# EAGLE board pca_full (EAGLE 6.5.0)
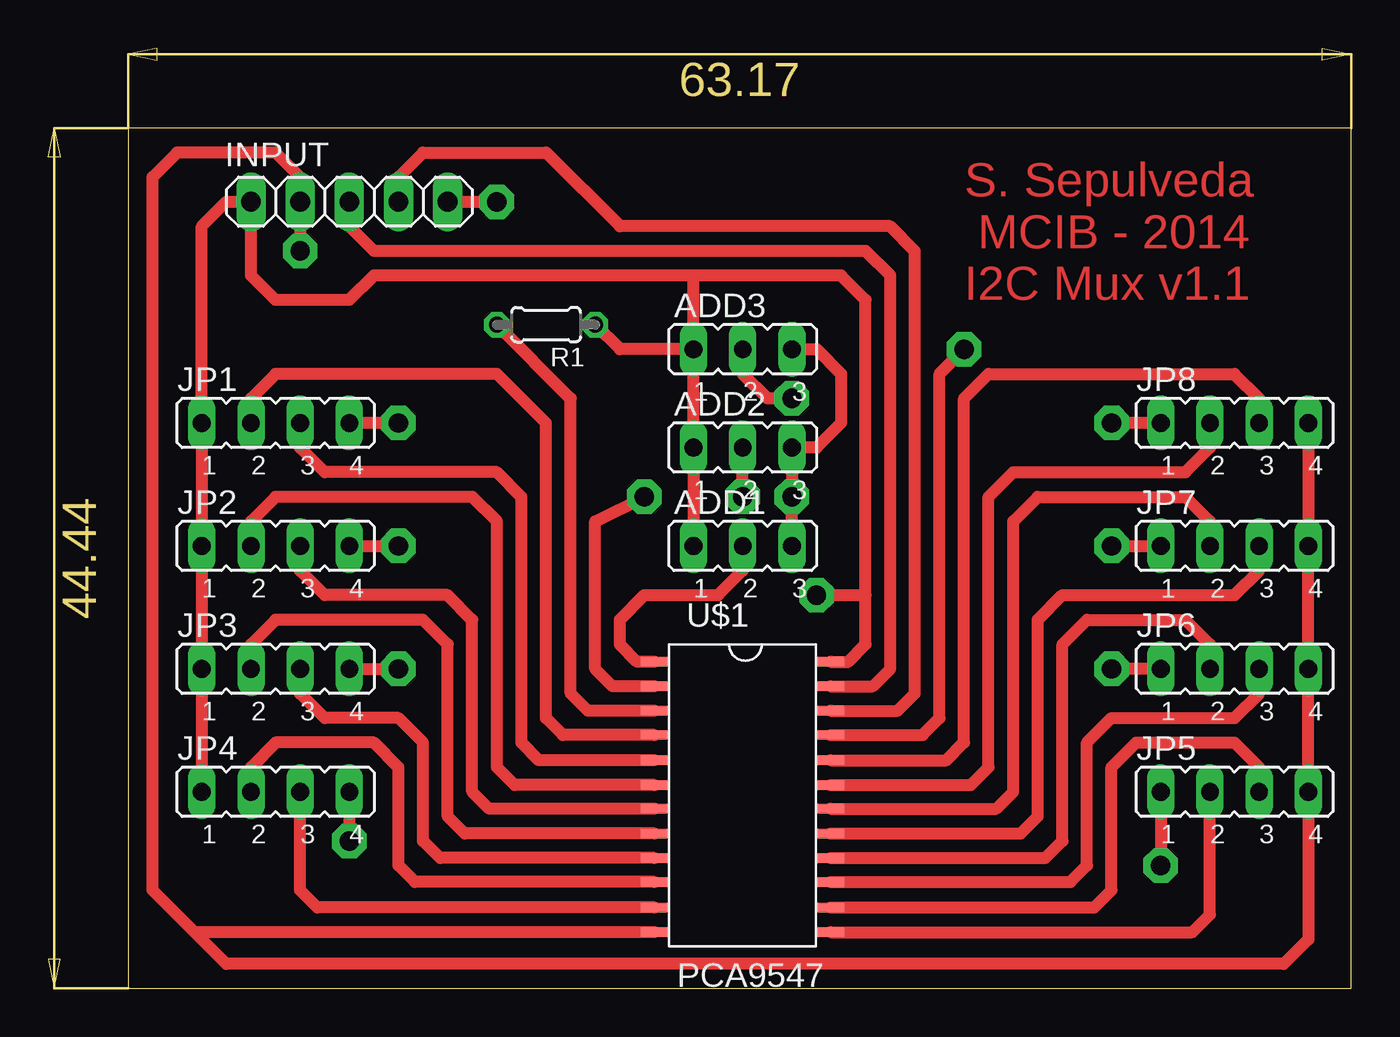
[diagram p0: board, top side]
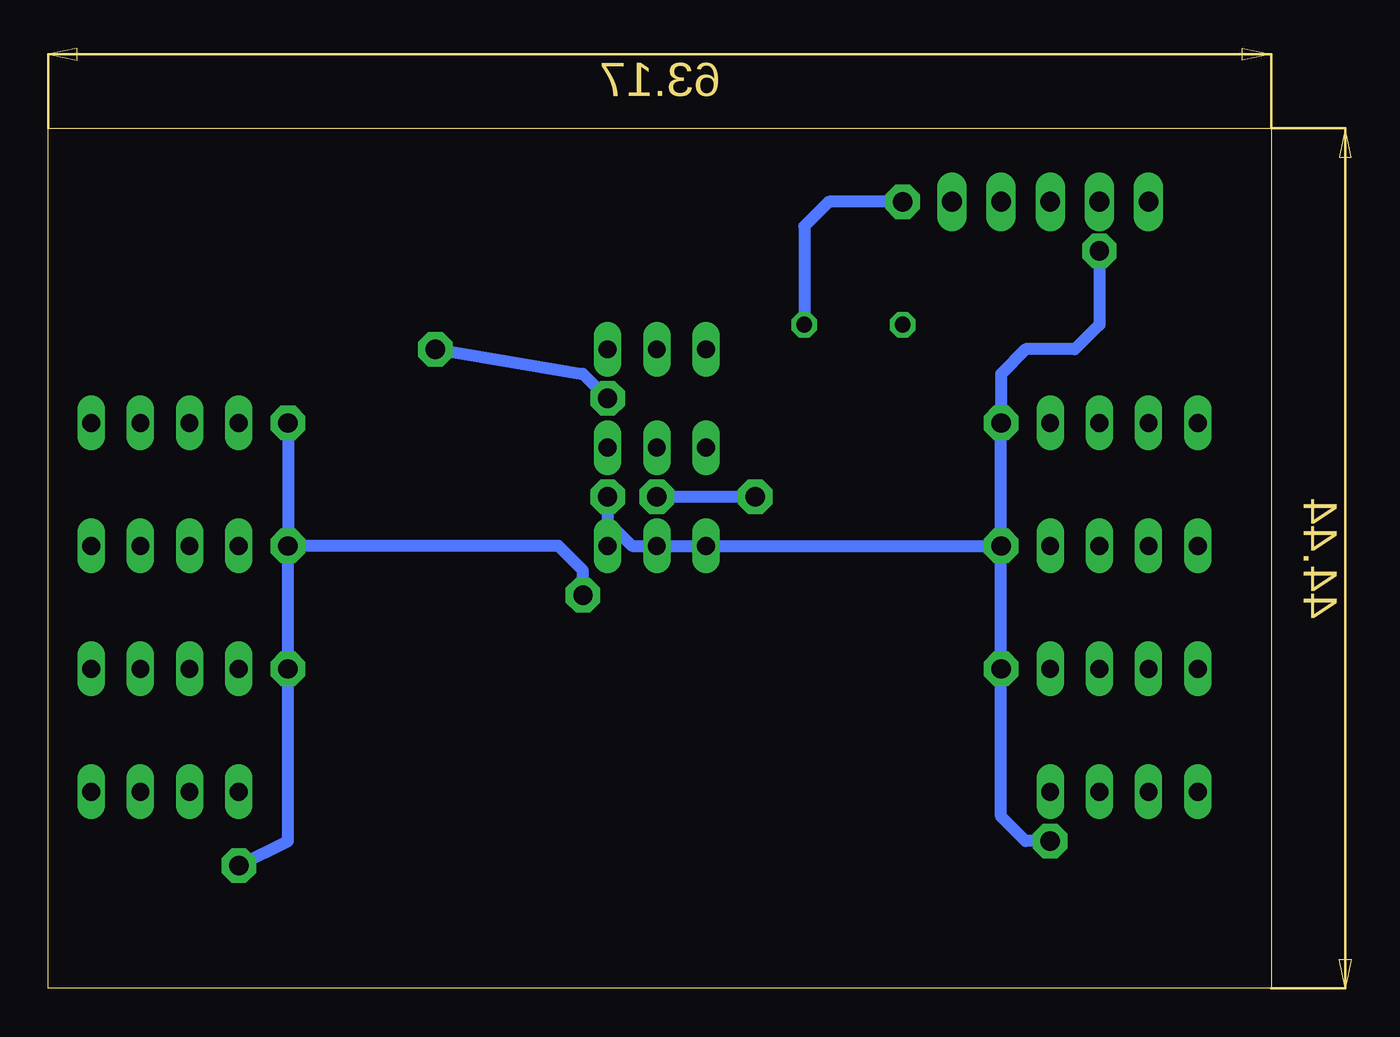
[diagram p1: board, bottom side, seen from below]

Size 63.17 x 44.44 mm. Coordinates in mm from the lower left corner, seen from the top.
Outline: 0,0 63.17,0 63.17,44.44 0,44.44 0,0
Copper layers (1*16): Top 0.035mm / dielectric 1.5mm / Bottom 0.035mm
Design rules "default": minimum track width 10mil, minimum drill 24mil, track to track 8mil, track to pad 8mil, pad to pad 8mil, via to via 8mil, smd to smd 8mil, copper to edge 40mil, drill to drill 8mil, minimum pad ring 10mil, minimum via ring 8mil, stop-mask expansion 4mil, vias tented up to drill 0mil, thermal gap 10mil

## Footprints (pad centres in the part's own frame; a part is rotated, then mirrored left to right if it is on the bottom)
JP2 = drill 0.914 long: 1 -2.54,0; 2 0,0; 3 2.54,0
1X05 = drill 1.016 long: 1 -5.08,0; 2 -2.54,0; 3 0,0; 4 2.54,0; 5 5.08,0
JP4 = drill 0.914 long: 1 -3.81,0; 2 -1.27,0; 3 1.27,0; 4 3.81,0
0204/5 = drill 0.813 octagon: 1 -2.54,0; 2 2.54,0
SO24 = smd 0.49 x 1.4: 1 0.9,-0.75; 2 2.17,-0.75; 3 3.44,-0.75; 4 4.68,-0.75; 5 5.99,-0.75; 6 7.27,-0.75; 7 8.5,-0.75; 8 9.77,-0.75; 9 11.04,-0.75; 10 12.28,-0.75; 11 13.59,-0.75; 12 14.87,-0.75; 13 14.87,8.35; 14 13.59,8.35; 15 12.28,8.35; 16 11.04,8.35; 17 9.77,8.35; 18 8.5,8.35; 19 7.27,8.35; 20 5.99,8.35; 21 4.68,8.35; 22 3.44,8.35; 23 2.17,8.35; 24 0.9,8.35

## Placement (x,y rotation side)
ADD1  [JP2]  31.75,22.86 0 top
ADD2  [JP2]  31.75,27.94 0 top
ADD3  [JP2]  31.75,33.02 0 top
INPUT  [1X05]  11.43,40.64 0 top
JP1  [JP4]  7.62,29.21 0 top
JP2  [JP4]  7.62,22.86 0 top
JP3  [JP4]  7.62,16.51 0 top
JP4  [JP4]  7.62,10.16 0 top
JP5  [JP4]  57.15,10.16 0 top
JP6  [JP4]  57.15,16.51 0 top
JP7  [JP4]  57.15,22.86 0 top
JP8  [JP4]  57.15,29.21 0 top
R1  4k7  [0204/5]  21.59,34.29 180 top
U$1  PCA9547  [SO24]  27.94,17.78 270 top

## Library data of the parts
ADD1-ADD3 JP1-JP8 = jumper
INPUT = pinhead
R1 = resistor
U$1 = pca9547

## Nets
+3V3: ADD1.1 ADD2.1 ADD3.1 INPUT.1 INPUT.5 JP1.1 JP2.1 JP3.1 JP4.1 JP5.1 JP6.1 JP7.1 JP8.1 R1.1 U$1.24
GND: ADD1.3 ADD2.3 ADD3.3 INPUT.2 JP1.4 JP2.4 JP3.4 JP4.4 JP5.4 JP6.4 JP7.4 JP8.4 U$1.12
N$1: ADD1.2 U$1.1
N$2: ADD2.2 U$1.2
N$3: ADD3.2 U$1.21
N$4: INPUT.4 U$1.22
N$5: INPUT.3 U$1.23
N$6: R1.2 U$1.3
SCL0: JP1.3 U$1.5
SCL1: JP2.3 U$1.7
SCL2: JP3.3 U$1.9
SCL3: JP4.3 U$1.11
SCL4: JP5.3 U$1.14
SCL5: JP6.3 U$1.15
SCL6: JP7.3 U$1.17
SCL7: JP8.3 U$1.20
SDA0: JP1.2 U$1.4
SDA1: JP2.2 U$1.6
SDA2: JP3.2 U$1.8
SDA3: JP4.2 U$1.10
SDA4: JP5.2 U$1.13
SDA5: JP6.2 U$1.16
SDA6: JP7.2 U$1.18
SDA7: JP8.2 U$1.19

## Tracks (layer width: path | path; a pad name or v marks a point on that pad's centre or on a via)
+3V3  (via drill 1 pad 1.78)
  Top 0.61: JP4.1 JP3.1 JP2.1 JP1.1 3.81,39.37 5.08,40.64 INPUT.1 6.35,36.83 7.62,35.56 11.43,35.56 12.7,36.83 29.21,36.83 | U$1.24 37.2,16.88 38.1,17.78 38.1,20.32 | 38.1,20.32 38.1,35.56 36.83,36.83 29.21,36.83 | ADD3.1 ADD2.1 ADD1.1 | v50.8,22.86 JP7.1 | JP6.1 v50.8,16.51 | JP5.1 v53.34,6.35 | JP8.1 v50.8,29.21 | v35.56,20.32 38.1,20.32 | ADD3.1 29.21,36.83 | ADD3.1 25.4,33.02 R1.1 | INPUT.5 v19.05,40.64
  Bottom 0.61: v50.8,29.21 v50.8,22.86 | v50.8,22.86 v50.8,16.51 50.8,7.62 v53.34,6.35 | v19.05,40.64 22.86,40.64 24.13,39.37 R1.1 | v35.56,20.32 35.56,21.59 36.83,22.86 v50.8,22.86
GND  (via drill 1 pad 1.78)
  Top 0.61: JP8.4 JP7.4 JP6.4 JP5.4 60.96,2.54 59.69,1.27 5.08,1.27 3.44,2.91 | ADD3.3 35.56,33.02 36.83,31.75 36.83,29.21 35.56,27.94 ADD2.3 v34.29,25.4 ADD1.3 | v8.89,38.1 INPUT.2 8.89,41.91 7.62,43.18 2.54,43.18 1.27,41.91 1.27,5.08 3.44,2.91 | v13.97,29.21 JP1.4 | JP2.4 v13.97,22.86 | JP3.4 v13.97,16.51 | JP4.4 v11.43,7.62 | U$1.12 3.44,2.91
  Bottom 0.61: v8.89,38.1 8.89,34.29 10.16,33.02 12.7,33.02 13.97,31.75 v13.97,29.21 v13.97,22.86 | v13.97,22.86 v13.97,16.51 13.97,8.89 12.7,7.62 v11.43,7.62 | v34.29,25.4 34.29,24.13 33.02,22.86 v13.97,22.86
N$1
  Top 0.61: U$1.1 26.3,16.88 25.4,17.78 25.4,19.05 26.67,20.32 30.48,20.32 31.75,21.59 ADD1.2
N$2  (via drill 1 pad 1.78)
  Top 0.61: U$1.2 25.03,15.61 24.13,16.51 24.13,24.13 v26.67,25.4 | v31.75,25.4 ADD2.2
  Bottom 0.61: v26.67,25.4 v31.75,25.4
N$3  (via drill 1 pad 1.78)
  Top 0.61: U$1.21 41.04,13.1 41.91,13.97 41.91,31.75 v43.18,33.02 | v34.29,30.48 33.02,30.48 31.75,31.75 ADD3.2
  Bottom 0.61: v43.18,33.02 35.56,31.75 v34.29,30.48
N$4
  Top 0.61: U$1.22 39.74,14.34 40.64,15.24 40.64,38.1 39.37,39.37 25.4,39.37 21.59,43.18 15.24,43.18 13.97,41.91 INPUT.4
N$5
  Top 0.61: U$1.23 38.47,15.61 39.37,16.51 39.37,36.83 38.1,38.1 12.7,38.1 11.43,39.37 INPUT.3
N$6
  Top 0.61: U$1.3 23.76,14.34 22.86,15.24 22.86,30.48 R1.2
SCL0
  Top 0.61: U$1.5 21.23,11.79 20.32,12.7 20.32,25.4 19.05,26.67 10.16,26.67 8.89,27.94 JP1.3
SCL1
  Top 0.61: U$1.7 18.66,9.28 17.78,10.16 17.78,19.05 16.51,20.32 10.16,20.32 8.89,21.59 JP2.3
SCL2
  Top 0.61: JP3.3 8.89,15.24 10.16,13.97 13.97,13.97 15.24,12.7 15.24,7.62 16.12,6.74 U$1.9
SCL3
  Top 0.61: JP4.3 8.89,5.08 9.78,4.19 U$1.11
SCL4
  Top 0.61: U$1.14 49.91,4.19 50.8,5.08 50.8,11.43 52.07,12.7 57.15,12.7 58.42,11.43 JP5.3
SCL5
  Top 0.61: U$1.15 48.68,5.5 49.53,6.35 49.53,12.7 50.8,13.97 57.15,13.97 58.42,15.24 JP6.3
SCL6
  Top 0.61: U$1.17 46.11,8.01 46.99,8.89 46.99,19.05 48.26,20.32 57.15,20.32 58.42,21.59 JP7.3
SCL7
  Top 0.61: U$1.20 42.27,11.79 43.18,12.7 43.18,30.48 44.45,31.75 57.15,31.75 58.42,30.48 JP8.3
SDA0
  Top 0.61: U$1.4 22.46,13.1 21.59,13.97 21.59,29.21 19.05,31.75 7.62,31.75 6.35,30.48 JP1.2
SDA1
  Top 0.61: U$1.6 19.97,10.51 19.05,11.43 19.05,24.13 17.78,25.4 7.62,25.4 6.35,24.13 JP2.2
SDA2
  Top 0.61: JP3.2 6.35,17.78 7.62,19.05 15.24,19.05 16.51,17.78 16.51,8.89 17.39,8.01 U$1.8
SDA3
  Top 0.61: JP4.2 6.35,11.43 7.62,12.7 12.7,12.7 13.97,11.43 13.97,6.35 14.82,5.5 U$1.10
SDA4
  Top 0.61: U$1.13 54.98,2.91 55.88,3.81 JP5.2
SDA5
  Top 0.61: U$1.16 47.38,6.74 48.26,7.62 48.26,17.78 49.53,19.05 54.61,19.05 55.88,17.78 JP6.2
SDA6
  Top 0.61: U$1.18 44.84,9.28 45.72,10.16 45.72,24.13 46.99,25.4 54.61,25.4 55.88,24.13 JP7.2
SDA7
  Top 0.61: U$1.19 43.53,10.51 44.45,11.43 44.45,25.4 45.72,26.67 54.61,26.67 55.88,27.94 JP8.2

## Text on the board
Top: S. Sepulveda / MCIB - 2014 / I2C Mux v1.1